# Altium PCB Game Joystick 510.PcbDoc (part 2 of 2)
Units mil, origin at the board's own origin, x right, y up, seen from the top; angles counter-clockwise.
Board outline 4889.97 x 4392.01 mil, 2 copper layers (Top Layer, Bottom Layer); 77 components, 82 nets, 383 pads, 99 vias.
Unrouted connection lines stored in the file: 79.
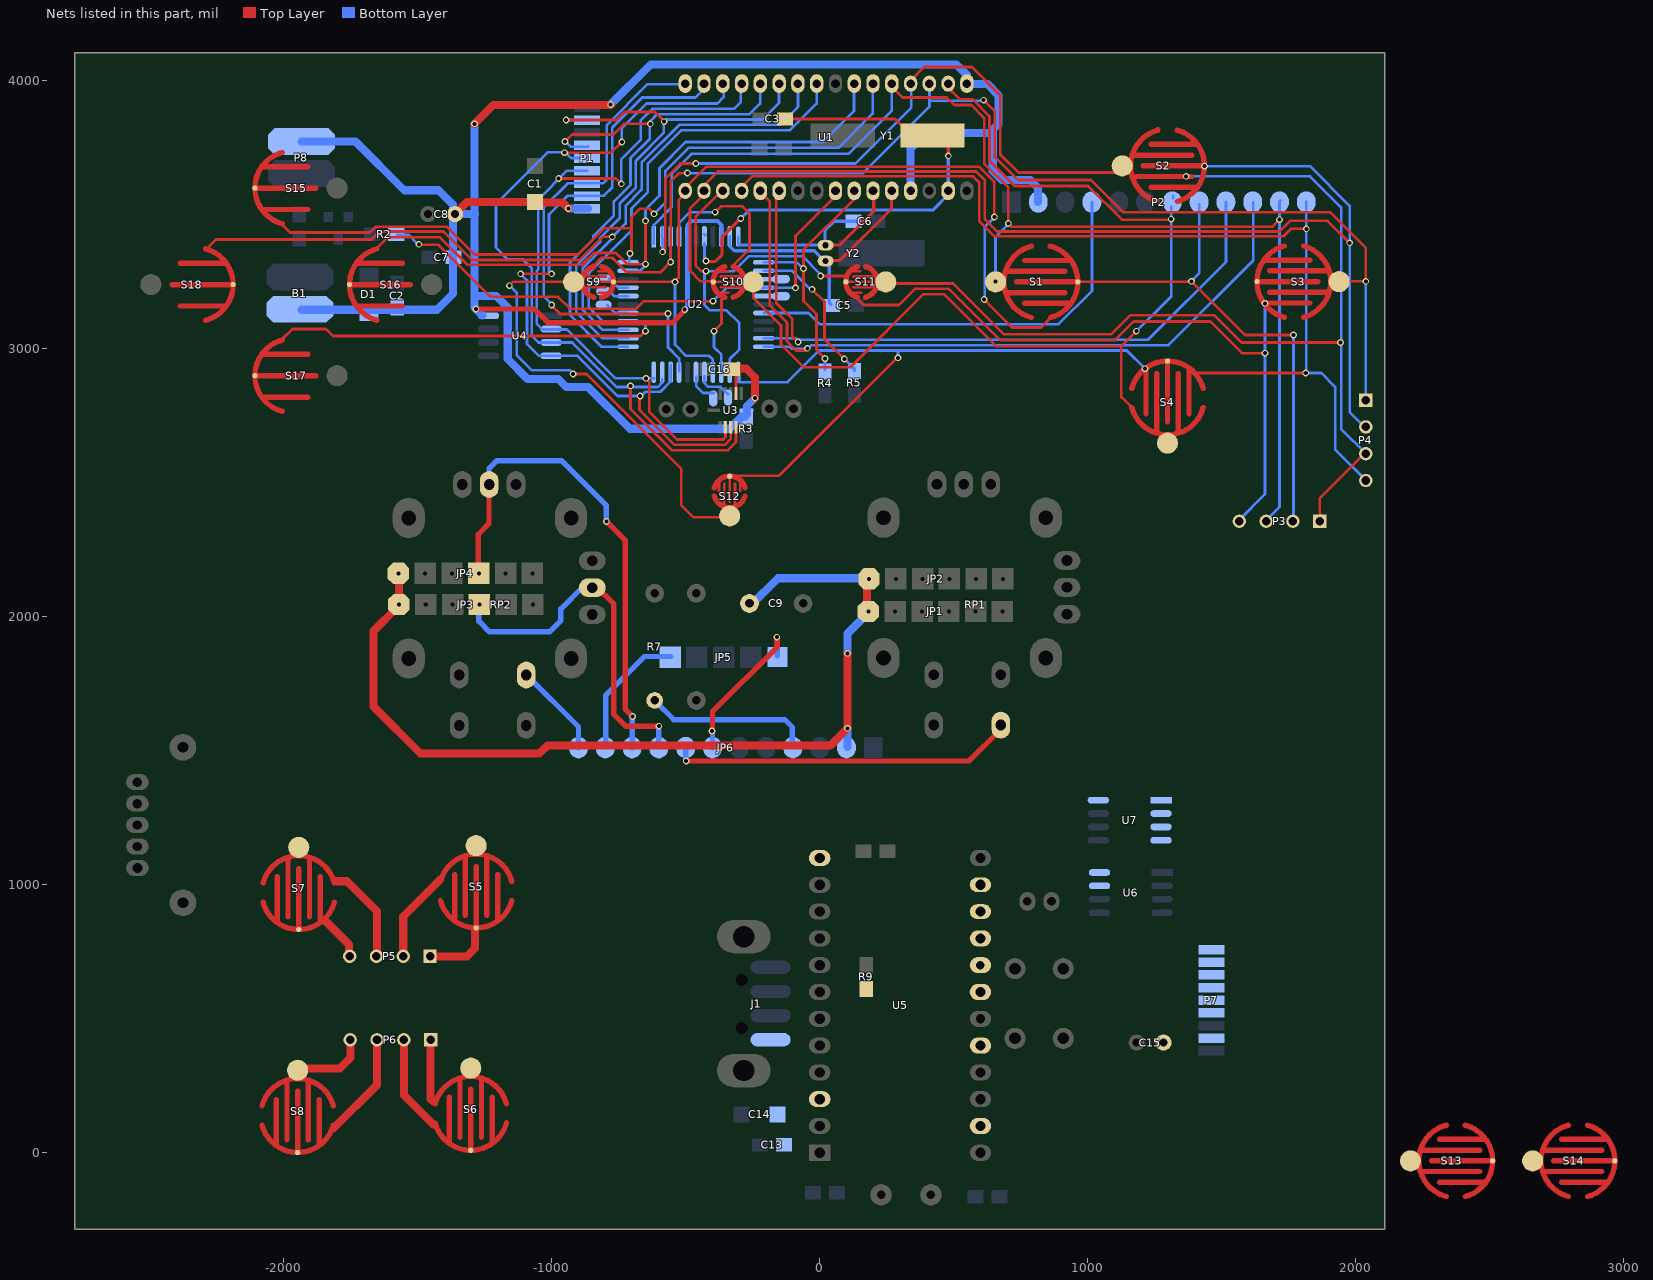
[diagram p2: the nets of this part, all layers, seen from the top]

## Via types
v1: diameter 25, hole 15, Top Layer to Bottom Layer, 90 vias
v2: diameter 30, hole 20, Top Layer to Bottom Layer, 9 vias

## Nets (pads, with @x,y where several pads share a name; then routed paths per layer and width w, separated by ;. In a path a pad name is that pad's centre, name@x,y a point inside that pad or via, vN(x,y) a via of type N, cw(c..) or ccw(c..) an arc to the next point about the centre after c; other vN are vias at no path point) (continued)
OSCO: C3.2 U1.2 U2.7 Y1.1 | length 1919
  Top Layer w10: v1(-424.06,3328.01) v1@-423.23,3327.19 ; v1(-294.56,3486.51) v1@-294.06,3486.01 ; C3.2@-122.06,3858.01 281.94,3858.01 371.94,3768.01 Y1.1@435.94,3768.01 ; U1.2@473.94,3574.01 U1.2@473.94,3590.01 ; U1.2@475.94,3590.01 U1.2@475.94,3592.01
  Top Layer w12: v1@-422.06,3326.01 -390.06,3326.01 -364.06,3352.01 -364.06,3418.01 v1@-296.06,3486.01 ; v1@479.94,3718.01 Y1.1@479.94,3764.01
  Bottom Layer w10: v1@-430.08,3334.03 v1(-424.06,3328.01) ; U2.7@-430.06,3428.01 U2.7@-426.06,3424.01
  Bottom Layer w12: v1@-430.08,3334.03 U2.7@-430.08,3393.16 ; v1(-294.56,3486.51) -263.06,3518.01 421.95,3518.01 479.94,3576 v1@479.94,3718.01
  other v1: 480,3720.35
P74: JP5.5 JP6.11 P2.11 P3.3 P5.3 S1.2 S7.2 S14.2 U1.28 U2.1 | length 5488.6
  Top Layer w10: -1812.06,1011.25 -1806.06,1011.25 ; P5.3@-1658.06,731.25 P5.3@-1658.06,733.34 ; U1.28@265.94,3982.01 309.6,3938.35 474,3938.35 502.34,3910.01 565.94,3910.01 613.94,3862 613.94,3692.01 704.22,3601.73 v1(704.22,3467.72) 715.93,3456.01 1689.94,3456.01 v1(1715.94,3482.01)
  Top Layer w30: -1806.06,1013.25 -1764.06,1013.25 -1652.06,901.25 -1652.06,741.25 P5.3@-1660.06,733.25
  Bottom Layer w10: U2.1@-619.06,3393.16 -619.06,3463.01 -552.06,3530.01 -552.06,3654.01 -478.06,3728.01 107.94,3728.01 269.2,3889.26 U1.28@269.2,3990.03 ; v1(655.94,3252.01) 655.94,3418.29 704.22,3466.57 v1(704.22,3467.72) ; P3.3@1664.35,2358.41 1715.94,2410.01 P2.11@1716,3548 ; P2.11@1715.94,3550.01 P2.11@1719.94,3554.01
  Bottom Layer w20: JP6.11@-798.06,1518.01 -798.06,1708.01 -654.06,1852.01 JP5.5@-556.06,1852.01
P75: P3.1 P4.3 P5.2 P6.4 S2.2 S5.2 S8.2 S11.2 U1.29 U2.2 | length 6980.8
  Top Layer w10: S8.2@-1946.06,313.25 S8.2@-1928.06,313.25 ; v1(-586.06,3362.01) -576.06,3372.01 -576.06,3636.01 -520.06,3692.01 v1(-462.06,3692.01) ; S11.2@259.94,3244.01 497.94,3244.01 687.6,3054.35 1088,3054.35 1159.66,3126.01 1471.94,3126.01 1573.94,3024.01 v1@1941.94,3024.01 ; U1.29@337.94,4000.01 389.94,4052.01 567.94,4052.01 673.94,3946.01 673.94,3726.01 741.94,3658.01 1105.94,3658.01 S2.2@1125.94,3678.01 ; P3.1@1865.94,2364.01 1865.94,2442.01 P4.3@2031.94,2608.01
  Top Layer w20: 1262.21,3816.17 1262.21,3818.27
  Top Layer w30: S8.2@-1942.9,314.49 -1790.9,314.49 -1750.9,354.49 P6.4@-1750.9,420.49 ; P5.2@-1554,733.34 -1554,881.31 -1416.06,1019.25
  Bottom Layer w10: U2.2@-590.06,3421.36 U2.2@-587.5,3423.91 ; U2.2@-587.56,3393.16 U2.2@-587.56,3454.5 ; v1@-586.06,3364.01 U2.2@-586.06,3412.01 ; v1(-462.06,3692.01) 133.94,3692.01 341.94,3900.01 U1.29@341.94,3986.01 ; v1(1367.94,3644.01) 1829.94,3644.01 1945.94,3528.01 1945.94,2700.81 P4.3@2038,2608.76
  other v1: 1943.94,3024.01
P76: P4.1 P6.1 S3.2 S6.2 S9.2 S12.2 U1.30 U2.3 | length 6434.1
  Top Layer w10: P6.1@-1452,421.34 P6.1@-1452.06,427.25 ; -1444.06,189.25 -1440.06,185.25 ; v1(-1158.06,3236.01) -1144.06,3250.01 -922.06,3250.01 S9.2@-918.06,3254.01 ; v1(-920.06,2906) -870.05,2906 -516.06,2552.01 -516.06,2416.01 -472.05,2372 S12.2@-336.06,2372 ; -846.06,3308 -814.06,3340 -774.06,3340 -753.9,3319.84 -720.06,3286 -594.06,3286 v1(-556.06,3324.01) ; v1@-556.06,3326.01 -556.06,3624.01 -524.06,3656.01 v1(-494.06,3656.01) ; S12.2@-338.06,2374.01 S12.2@-336.06,2374.01 ; U1.30@407.94,3994.01 U1.30@407.94,4008.01 ; v1(611.94,3928.01) 653.94,3886.01 653.94,3716.01 739.94,3630.01 1011.94,3630.01 1131.94,3510.01 1903.94,3510.01 2037.94,3376.01 v1(2037.94,3252.01) S3.2@1938.49,3252.01
  Top Layer w20: -846.06,3306 -846.06,3308
  Top Layer w30: P6.1@-1452.06,423.25 -1452.06,201.25 -1442.06,191.25
  Bottom Layer w10: v1(-1158.06,3236.01) -1130.06,3208.01 -1130.06,2976.01 -1074.05,2920 -932.06,2920 v1@-920.06,2908 ; v1@-929.51,2906 v1(-920.06,2906) ; v1@-556.01,3330.06 U2.3@-556.01,3423.91 ; v1(-494.06,3656.01) 161.94,3656.01 409.94,3904.01 U1.30@409.94,3988.01 ; 409.94,3926.01 v1@609.94,3926.01 ; P4.1@2037.94,2812.01 v1(2037.94,3252.01)
P77: JP5.1 JP6.7 P2.7 S4.2 S10.2 S13.2 U1.31 U2.4 | length 4974.1
  Top Layer w10: v1(-390.06,3510.01) -368.06,3532.01 -288.06,3532.01 -262.06,3506.01 -262.06,3372.01 -318.06,3316.01 -318.06,3312.01 ; -326.06,3308.01 -318.06,3308.01 -318.06,3310.01 -317.06,3311.01 ; S10.2@-248.06,3250 -248.06,3192 -144.06,3088 -144.06,3016.01 -60.05,2932 115.94,2932 387.94,3204 463.94,3204 657.6,3010.35 1126.28,3010.35 v1(1181.94,3066.01) v1@1181.94,3064.29 ; U1.31@473.94,3980.01 521.94,3932.01 569.94,3932.01 633.94,3868 633.94,3702.01 727.94,3608.01 1001.94,3608.01 1127.94,3482.01 v1@1311.94,3482.01 ; U1.31@477.94,3980.01 U1.31@477.94,3988.01 ; 1125.94,3010.01 1125.94,2820.01 1164.99,2780.96
  Top Layer w20: v1(-402.06,1574.01) -400.06,1576.01 -400.06,1646.01 -158.06,1888.01 v1@-158.06,1924.01 ; v1@-401.94,1568.01 v1@-401.94,1574.12
  Bottom Layer w10: U2.4@-524.57,3390.01 -524.57,3469.5 -484.06,3510.01 v1(-390.06,3510.01) ; v1@-401.94,1568.01 v1@-400,1569.95 ; v1(-160.06,1924.01) v1@-158.06,1922.01 ; v1(1181.94,3066.01) 1311.94,3196.01 P2.7@1311.94,3530.01 ; P2.7@1319.94,3562.01 P2.7@1319.94,3572.01
  Bottom Layer w20: JP6.7@-400,1512 v1@-400,1569.95 ; JP5.1@-158.06,1854.01 v1@-158.06,1922.01
  other v1: 1311.94,3484.01
P81_LED: R4.1 U1.7 U2.12 | length 992.6
  Top Layer w10: v1@19.94,2960.01 v1(19.94,2964.01) -12.06,2996.01 -12.06,3130 -60.06,3178 -60.06,3370.01 127.94,3558.01 U1.7@127.94,3588.01
  Bottom Layer w10: U2.12@-208.91,3323.01 -85.06,3323.01 -64.06,3302.01 v1@-60.06,3302.01 ; R4.1@19.94,2922.01 v1@19.94,2960.01 ; U1.7@125.94,3558.01 U1.7@125.94,3586.01 ; U1.7@127.94,3560.01 U1.7@127.94,3590.01
  other v1: -60.06,3300.01
P82_LED: R5.1 U2.13 | length 588.3
  Top Layer w10: v1(-28.06,3222) 17.94,3176 17.94,3036.01 v1(91.94,2962.01)
  Bottom Layer w10: U2.13@-208.91,3291.51 -103.56,3291.51 -36.05,3224 v1@-28.06,3224 ; v1(91.94,2962.01) 129.94,2924.01 R5.1@129.94,2918.01 ; R5.1@121.94,2928.01 R5.1@131.94,2928.01
P84_MOTOR: R2.1 U1.8 U2.15 | length 2057.3
  Top Layer w10: v1@-1494.06,3388.01 -1422.06,3388.01 -1228.06,3194.01 -976.06,3194.01 -932.06,3150.01 -684.05,3150.01 -656.06,3178 v1(-398.06,3178) ; v1@-90.06,3230.01 -90.06,3422.01 U1.8@69.94,3582.01
  Bottom Layer w10: R2.1@-1576.06,3426.01 -1534.06,3426.01 v1@-1500.06,3392 ; v1(-398.06,3178) -348.05,3228.01 v1@-88.06,3228.01 ; U1.8@58.96,3588.01 U1.8@58.96,3590.03 ; U1.8@61.94,3578.01 U1.8@61.94,3588.01
  other v1: -90.06,3228.01 -1496.06,3390.01
P94: JP6.12 P2.12 P4.4 P6.3 RP2.8 S4.1 S8.1 S12.1 S14.1 U1.13 U2.23 | length 7111.8
  Top Layer w10: S12.1@-335.8,2526.57 -151.78,2526.57 v1@289.65,2968 ; U1.13@-291.43,3590.03 -291.43,3604.63 -252.06,3644.01 571.94,3644.01 596,3619.95 596,3475.95 651.94,3420.01 1729.94,3420.01 1757.94,3448.01 v1(1815.94,3448.01) ; 1399.64,2910.01 v1(1813.94,2910.01)
  Top Layer w30: -1812.06,93.25 -1652,253.31 P6.3@-1652,421.34
  Bottom Layer w10: U2.23@-304.02,2917.61 -304.02,2881.97 -298.06,2876.01 -120.05,2876.01 -2.05,2994.01 1145.94,2994.01 v1(1213.94,2926.01) ; U1.13@-292.06,3588.01 U1.13@-290.06,3588.01 ; v1(292,2966.35) 292,2992.36 ; v1(1813.94,2910.01) 1871.94,2910.01 1923.94,2858.01 1923.94,2624.01 P4.4@2035.94,2512.01 ; 1815.94,3430.01 1815.94,3501.95 1816,3502.01 P2.12@1816,3548 ; v1@1816,2912.06 1816,3430.01
  Bottom Layer w20: RP2.8@-1090.06,1780.01 -900,1589.95 JP6.12@-900,1512
P95: P3.4 P5.4 S3.1 S7.1 S11.1 U1.14 U2.24 | length 4316.3
  Top Layer w10: -1856.06,863.25 -1851.06,858.25 ; v1(-424.06,3290.01) -442.06,3290.01 -462.06,3310.01 -462.06,3494.01 -368.06,3588.01 U1.14@-362.06,3588.01 ; U1.14@-362.06,3578.01 U1.14@-362.06,3586.01 ; U1.14@-360.06,3574.01 U1.14@-360.06,3592.01 ; v1@7.94,3272.01 95.94,3272.01 115.94,3292.01 ; 141.94,3190.01 141.94,3186.01 163.94,3164.01 295.95,3164.01 355.94,3224 481.94,3224 673.6,3032.35 1102,3032.35 1171.66,3102.01 1457.94,3102.01 1575.94,2984.01 v1(1661.94,2984.01)
  Top Layer w20: v1(1661.94,3170.01) 1663.04,3171.1 1743.94,3171.1
  Top Layer w30: -1844.06,865.25 -1756.06,777.25 P5.4@-1756.06,731.25
  Bottom Layer w10: U1.14@-360.06,3570.01 U1.14@-360.06,3582.01 ; U2.24@-335.51,2917.61 -335.51,2962.54 -300,2998.06 -300,3095.94 -348.06,3144 -410.06,3144 -430.06,3164 -430.06,3284.01 v1(-424.06,3290.01) -320.06,3290.01 -264.06,3346 -64.05,3346 3.94,3278.01 v1@3.94,3270.01 ; P3.4@1563.94,2360.01 1661.94,2458.01 v1(1661.94,3170.01)
  other v1: 3.94,3272
P96: P4.2 P6.2 S2.1 S6.1 S10.1 U1.15 U2.25 | length 5213.9
  Top Layer w10: -1437.06,110.25 -1434.06,107.25 ; U1.15@-431.59,3590.03 U1.15@-431.59,3592.01 ; U1.15@-431.59,3610.47 -380.06,3662.01 583.94,3662.01 616,3629.95 616,3484.35 662.34,3438.01 1715.94,3438.01 1755.94,3478.01 1895.94,3478.01 v1(1977.94,3396.01) ; U1.15@-430.06,3592.01 -430.06,3578.01 -484.06,3524.01 -484.06,3292.01 -444.06,3252.01 S10.1@-398.06,3252.01 ; v1@-394.06,3068.01 -392.34,3068.01 -366.06,3094.29 -366.06,3184.01 -354.06,3196.01
  Top Layer w30: P6.2@-1552.06,423.25 -1552.06,215.25 -1442.06,105.25
  Bottom Layer w10: v1@-394.06,3068.01 -394.06,3006.01 -367.01,2978.96 U2.25@-367.01,2917.61 ; v1(1435.94,3682.01) 1829.94,3682.01 1977.94,3534.01 1977.94,2764.01 P4.2@2033.94,2708.01
  other v1: -394,3066.35
P97: JP6.8 P2.8 P3.2 P5.1 RP1.10 S1.1 S5.1 S9.1 S13.1 U1.16 U2.26 | length 6425.8
  Top Layer w10: S9.1@-767.92,3250.03 -580.06,3250.03 ; -580.03,3250.01 v1(-540.06,3250) ; v1@-540.06,3248 -540.06,3252.01 -526.06,3266.01 -526.06,3556 U1.16@-500.06,3582 ; U1.16@-504.06,3596.01 -504.06,3598.01 -422.06,3680.01 593.94,3680.01 652,3621.95 v1@652,3488.01 ; U1.16@-502.06,3580.01 U1.16@-500.06,3580.01 ; U1.16@-502.06,3588.01 U1.16@-500.06,3586.01 ; U1.16@-495.71,3589.13 -495.18,3592.63 U1.16@-494.06,3600.01 ; v1(613.94,3184.01) 717.94,3080.01 825.94,3080.01 863.94,3118.01 ; S1.1@963.35,3250.03 1387.94,3250.03 1389.92,3250.03 1587.94,3052.01 v1(1767.94,3052.01)
  Top Layer w20: v1@-498.06,1464.01 -496.06,1462.01 557.95,1462.01 673.94,1578 RP1.10@673.94,1596.01
  Top Layer w30: P5.1@-1454,733.34 -1316.05,733.34 -1286.06,763.33 S5.1@-1286.06,831.25
  Bottom Layer w10: v1@-540.06,3248 -540.06,3016.01 -498.06,2974.01 -412.06,2974.01 -398.5,2960.46 U2.26@-398.5,2917.61 ; v1@-500,1465.95 v1@-498.06,1464.01 ; v1(613.94,3184.01) 615.94,3186.01 615.94,3454.29 649.66,3488.01 v1@652,3488.01 ; v1@1387.94,3254.01 1415.94,3282.01 P2.8@1415.94,3540.01 ; P3.2@1767.94,2360.01 v1(1767.94,3052.01)
  Bottom Layer w20: v1@-500,1465.95 JP6.8@-500,1512
  other v1: -498.06,1462.01 1387.94,3252.01 652,3492.35
PB1_LEFT: S18.1 U1.23 U2.36 | length 3218.6
  Top Layer w10: -2287.92,3372.15 -2252.06,3408.01 -1672.06,3408.01 -1642.06,3438.01 -1404.06,3438.01 -1298.06,3332.01 -896.06,3332.01 -810.06,3418.01 v1(-774.06,3418.01)
  Bottom Layer w10: U2.36@-714.91,3071.04 -810.69,3071.04 -884,3144.35 -884,3302.35 -774.06,3412.29 v1(-774.06,3418.01) -724.06,3468.01 -724.06,3534.01 -664.06,3594.01 -664.06,3696.01 -524.06,3836.01 -148.06,3836.01 -81.2,3902.87 U1.23@-81.2,3990.03
PB2_DOWN: S17.1 U1.24 U2.37 | length 3078.5
  Top Layer w10: -2006.06,3036.01 -1968.06,3074.01 -1842.06,3074.01 -1816.06,3048.01 -668.34,3048.01 -652.35,3064 v1@-646.06,3064
  Bottom Layer w10: v1@-650.06,3068 -650.06,3089.99 -662.6,3102.54 -808.19,3102.54 -862,3156.35 -862,3282.06 -702.06,3442.01 -702.06,3524.01 -642.06,3584.01 -642.06,3690.01 -516.06,3816.01 -110.06,3816.01 -11.12,3914.94 U1.24@-11.12,3990.03
  other v1: -650.06,3066
PB4_RIGHT: S16.1 U1.26 U2.43 | length 2454.3
  Top Layer w10: -1648.06,3380.01 -1612.06,3416.01 -1416.06,3416.01 -1314.06,3314.01 -886.06,3314.01 -842.06,3358 -760.06,3358 -718.06,3316 v1(-650.06,3316) ; v1@-652.06,3316 -650.06,3318 v1@-650.06,3476.01
  Bottom Layer w10: U2.43@-714.91,3291.51 -670.55,3291.51 -652.06,3310.01 v1@-652.06,3316.01 ; v1(-650.06,3478.01) -650.06,3520.01 -598.06,3572.01 -598.06,3674.01 -500.06,3772.01 11.94,3772.01 127.94,3888.01 U1.26@127.94,3982.01
PB5_UP: S15.1 U1.27 U2.44 | length 2836.4
  Top Layer w10: -2010.06,3468.01 -1976.06,3434.01 -1678.06,3434.01 -1656.06,3456.01 -1392.06,3456.01 -1288.06,3352.01 -902.06,3352.01 -804.06,3450.01 -704.06,3450.01 -702.06,3452.01 ; v1@-710.06,3356.01 -702.06,3364.01 -702.06,3492.01 -671.72,3522.35 -634.4,3522.35 v1@-618.06,3506.01
  Bottom Layer w10: U2.44@-710.06,3326.01 v1@-710.06,3356.01 ; v1(-618.06,3504.01) -576.06,3546.01 -576.06,3664.01 -490.06,3750.01 69.94,3750.01 197.94,3878.01 U1.27@197.94,3986.01
  other v1: -708.06,3356.01
PKT_FLAG_P66: P7.8 U5.20
PKT_FLAG_PB0: P1.8 U1.22 U2.35 | length 2074.1
  Top Layer w10: v1(-946.06,3854.01) -758.06,3854.01 -728.06,3884.01 -614.06,3884.01 v1@-580.06,3850.01
  Bottom Layer w10: v1(-946.06,3854.01) P1.8@-864.06,3854.01 ; U2.35@-714.91,3039.54 -811.2,3039.54 -908,3136.35 -908,3310.35 -820.06,3398.29 -820.06,3414.01 -746.06,3488.01 -746.06,3542.01 -686.06,3602.01 -686.06,3702.01 -582.06,3806.01 v1@-582.06,3848.01 ; v1@-572.06,3856.01 -214.06,3856.01 -152.06,3918.01 U1.22@-152.06,3992.01
  other v1: -580.06,3848.01
REFERENCE: JP6.4 P2.4 R7.1 U2.18 | length 2250.2
  Bottom Layer w10: U2.18@-208.91,3134.03 -42.08,3134.03 -0.06,3092.01 891.94,3092.01 1016,3216.06 P2.4@1016,3548
  Bottom Layer w20: R7.1@-614.06,1686.01 -544.06,1616.01 -130.06,1616.01 -102.06,1588.01 JP6.4@-102.06,1516.01
RESET_N_P61: P7.3 U5.15
RF_RESET_PA3: P1.3 U1.17 U2.30 | length 1894.3
  Top Layer w10: v1@-1000.06,3162.01 -968.05,3130 v1@-568.06,3130
  Bottom Layer w10: v1@-998.06,3166.01 -1030.06,3198.01 -1030.06,3528.01 -940.06,3618.01 P1.3@-868.06,3618.01 ; P1.3@-868.06,3617.71 -808.36,3617.71 -794.06,3632.01 -794.06,3836.01 -642.06,3988.01 U1.17@-500.06,3988.01 ; v1(-566.06,3132) -566.06,3006.01 -524.49,2964.44 U2.30@-524.49,2917.61 ; U1.17@-501.67,3988.01 U1.17@-501.67,3990.03
  other v1: -1000.06,3164.01
RX_P93/AD0: JP4.4 JP6.10 P2.10 RP2.5 U1.12 U2.22 | length 4775.5
  Top Layer w10: JP4.4@-1270.06,2160.01 JP4.4@-1270.06,2162.01 ; RP2.5@-1236.06,2492.01 RP2.5@-1236.06,2498.01 ; U1.12@-223.72,3587.67 -186.06,3550.01 -186.06,3162.01 -122.06,3098.01 -122.06,3028.01 -88.06,2994.01 -54.06,2994.01 v1(-46.06,3002.01)
  Top Layer w20: JP4.4@-1274.06,2162.01 -1274.06,2308.01 -1234.06,2348.01 RP2.5@-1234.06,2492.01 ; v1(-796.06,2356.01) -726.06,2286.01 -726.06,1656.01 v1(-698.06,1628.01)
  Bottom Layer w10: JP6.10@-700,1512 JP6.10@-700,1512 ; v1@-700,1626.06 v1(-698.06,1628.01) ; U1.12@-222.06,3564.01 U1.12@-222.06,3586.01 ; U2.22@-208.06,3008.01 -112.06,3008.01 -104.06,3000.01 -44.06,3000.01 -30.06,3014.01 1301.94,3014.01 1617.94,3330.01 P2.10@1617.94,3546.06
  Bottom Layer w20: RP2.5@-1234.06,2500.01 -1234.06,2554.01 -1206.06,2582.01 -962.06,2582.01 -796.06,2416.01 v1(-796.06,2356.01) ; JP6.10@-700,1512 v1@-700.06,1630.01
RY_P92/AD1: JP3.4 JP6.9 P2.9 RP2.2 U1.11 U2.21 | length 4029.3
  Top Layer w10: U1.11@-148.06,3584.01 -162,3570.06 -162,3171.95 -102.06,3112.01 -102.06,3046.01 v1@-82.06,3026.01 ; v1@-81.06,3027.01 v1(-80.06,3026.01)
  Top Layer w20: RP2.2@-834.06,2114.01 -768.06,2048.01 -768.06,1636.01 -724.06,1592.01 v1(-600.06,1592.01)
  Bottom Layer w10: JP6.9@-600.06,1526.01 JP6.9@-596.06,1522.01 ; U2.21@-208.06,3040.01 -90.06,3040.01 -84.06,3034.01 1225.94,3034.01 1516,3324.06 P2.9@1516,3548
  Bottom Layer w20: JP3.4@-1272.06,2046.01 -1272.06,1984.01 -1232.06,1944.01 -1008.06,1944.01 -966.06,1986.01 -966.06,2030.01 -886.06,2110.01 RP2.2@-848.06,2110.01 ; JP6.9@-600.06,1526.01 v1(-600.06,1592.01)
SPI_CLK_P62: P7.4 U5.16 U7.2
SPI_CLK_PA6: P1.4 U1.20 U2.33 U3.7 U4.2 | length 2685.7
  Top Layer w10: v1(-974.06,3636.01) -760.06,3636.01 v1(-740.06,3616.01) ; v1(-648.06,2890.01) -636.06,2878.01 -636.06,2766.01 -532.06,2662.01 -360.06,2662.01 -351.69,2670.38 U3.7@-351.69,2707.76
  Bottom Layer w10: P1.4@-868.06,3664.95 -943.11,3664.95 -1050.06,3558.01 -1050.06,3296.01 -1056.06,3290.01 -1056.06,3094.01 -1034.06,3072.01 -943.66,3072.01 -761.66,2890.01 U2.33@-618.06,2890.01 ; v1(-740.06,3616.01) -740.06,3708.01 -668.06,3780.01 -668.06,3852.01 -624.06,3896.01 -320.06,3896.01 -294.06,3922.01 U1.20@-294.06,3984.01
SPI_CS_P56: U5.12 U7.1
SPI_MISO_P60: P7.2 U5.14 U7.4
SPI_MISO_PA4: P1.2 U1.18 U2.31 U3.8 U4.4 | length 2773.5
  Top Layer w10: v1(-1116.06,3280.01) v1(-1000.06,3280.01) ; v1@-672.06,2824.01 -672.06,2772.01 -542.06,2642.01 -354.06,2642.01 -332,2664.06 U3.8@-332,2707.76 ; U1.18@-432.06,3960.01 U1.18@-432.06,3996.01
  Bottom Layer w10: v1(-1116.06,3280.01) -1092.06,3256.01 -1092.06,3018.01 -1048.06,2974.01 -903.66,2974.01 -753.66,2824.01 -666.05,2824.01 -650.06,2840 -593.52,2840 -555.98,2877.53 -555.98,2912.08 U2.31@-558.06,2910.01 ; v1(-1000.06,3280.01) -1010.06,3290.01 -1010.06,3502.01 -940.06,3572.01 -804.06,3572.01 -774.06,3602.01 -774.06,3826.01 -662.06,3938.01 -464.06,3938.01 -434.06,3968.01 U1.18@-434.06,3994.01 ; U2.31@-555.98,2917.61 U2.31@-555.98,2940.01
  other v1: -670.06,2824.01
SPI_MOSI_P63: P7.5 U5.17 U7.3
SPI_MOSI_PA5: P1.5 U1.19 U2.32 U3.9 U4.3 | length 2956.5
  Top Layer w10: v1(-952.06,3732.01) -778.12,3732.01 v1(-738.06,3772.07) ; v1(-706.06,2862.01) -706.06,2776.01 -552.06,2622.01 -342.06,2622.01 -312.32,2651.75 U3.9@-312.32,2707.76
  Bottom Layer w10: P1.5@-868.06,3712.19 -928.24,3712.19 -950.06,3734.01 -1014.06,3734.01 -1208.06,3540.01 -1208.06,3378.01 -1164.06,3334.01 -1108.06,3334.01 -1074.06,3300.01 -1074.06,3048.01 -1050.06,3024.01 -923.66,3024.01 -757.66,2858.01 -604.06,2858.01 -587.54,2874.53 U2.32@-587.54,2886.86 ; v1(-738.06,3772.07) -738.06,3824.01 -646.06,3916.01 -382.06,3916.01 -358.06,3940.01 U1.19@-358.06,3980.01
SPI_SS_P64: P7.6 U5.18
SPI_SS_PA7: P1.6 U1.21 U2.34 | length 2057.1
  Top Layer w10: v1@-948.06,3776.01 -924.06,3800.01 -770.06,3800.01 -730.06,3840.01 v1(-632.06,3840.01)
  Bottom Layer w10: v1@-948.06,3774.01 -928.06,3754.01 -866.06,3754.01 P1.6@-864.06,3756.01 ; U2.34@-716.06,3006.01 -718.06,3008.01 -813.66,3008.01 -932,3126.35 -932,3322.4 -844.06,3410.35 -844.06,3422.01 -768.06,3498.01 -768.06,3550.01 -706.06,3612.01 -706.06,3712.01 -634.06,3784.01 v1@-634.06,3838.01 ; v1(-632.06,3840.01) -632.06,3850.01 -606.06,3876.01 -262.06,3876.01 -222.06,3916.01 U1.21@-222.06,3989.33
  other v1: -950.06,3774.01
TEST_P71: pad.1 U2.40 | length 80.3
  Bottom Layer w10: pad.1@-786,3216.35 -766,3196.35 U2.40@-714,3196.35
TEST_P72: pad.0 U2.41 | length 84.1
  Bottom Layer w10: pad.0@-786,3262.35 -752,3228.35 U2.41@-716,3228.35
TEST_P83: pad.5 U2.14
TEST_P85: pad.6 U2.16
TEST_PA0: pad.3 U2.27 | length 131.4
  Bottom Layer w10: U2.27@-430,2898.35 -430,2872.35 -416,2858.35 -370,2858.35 pad.3@-342,2830.35
TEST_PA1: pad.4 U2.28 | length 111.5
  Bottom Layer w10: U2.28@-460,2896.35 -460,2860.35 -434.9,2835.24 pad.4@-394.9,2835.24
TEST_PB3: pad.2 U2.38 | length 88.8
  Bottom Layer w10: pad.2@-792,3162.35 -763.68,3134.03 U2.38@-714.91,3134.03
V3.3: C15.1 P7.1 R9.1 U5.3 | length 4.5
  Top Layer w25: C15.1@1283.94,412.09 C15.1@1287.1,415.24
VDD: B1.1 C1.1 C2.2 C7.2 C8.1 C9.2 C13.2 C14.1 C16.2 D1.1 J1.1 JP1.1 JP2.1 JP3.1 JP4.1 JP6.2 P1.1 P2.2 P8.1 R3.1 U1.4 U1.32 U2.5 U2.9 U3.2 U4.8 U5.23 U6.7 U6.8 U7.8 | length 12687.5
  Top Layer w10: JP4.1@-1570.06,2170.01 JP4.1@-1568.06,2172.01 ; U3.2@-312.32,2833.75 C16.2@-312.32,2906.26 ; JP2.1@175.94,2126.01 JP2.1@181.94,2132.01
  Top Layer w20: v1(-1283.04,3149) -1065.05,3149 -1014.06,3098 -548.35,3098 -504,3142.35 v1(-504,3146.35)
  Top Layer w30: JP3.1@-1570.9,2041.24 -1664.9,1947.24 -1664.9,1665.24 -1488.9,1489.24 -1046.9,1489.24 -1016.13,1520.01 39.94,1520.01 v1(103.94,1584.01) v1(103.94,1864.01) ; JP3.1@-1570.06,2054.01 JP4.1@-1570.06,2170.01 ; C8.1@-1360.06,3504.01 -1316.06,3548.01 C1.1@-1064.06,3548.01 ; v1(-1288.06,3840.01) -1218.06,3910.01 v1@-778.06,3910.01 ; C1.1@-1062.06,3546.01 -960.06,3546.01 v1(-938.06,3524.01) ; C16.2@-330.06,2926 -274.06,2926 -242.06,2894 v1(-242.06,2816.01) ; JP1.1@175.94,2020.01 JP2.1@175.94,2126.01
  Bottom Layer w15: U2.5@-493.07,3393.16 -493.07,3462.99 -478.56,3477.51 -381.56,3477.51 -367.09,3463.04 U2.9@-367.09,3393.16 ; R3.1@-274,2746.76 R3.1@-274.06,2756.01 ; U1.4@335.94,3596.01 U1.4@335.94,3620.01
  Bottom Layer w20: v1(-504,3146.35) -493.07,3157.28 U2.5@-493.07,3420
  Bottom Layer w30: B1.1@-1934.06,3146.01 -1428.06,3146.01 -1368.06,3206.01 -1368.06,3538.01 -1422.06,3592.01 -1550.06,3592.01 -1732.06,3774.01 P8.1@-1934.06,3774.01 ; C2.2@-1572.06,3146.01 C2.2@-1564.06,3154.01 ; C8.1@-1364,3502.76 -1286.8,3502.76 -1288.06,3501.5 -1288.06,3154.01 U4.8@-1258.06,3124.01 ; -1288.06,3508.01 v1(-1288.06,3840.01) ; -1284.06,3198 -1208.06,3198 -1164.06,3154 -1164.06,2962 -1090.06,2888 -975.65,2888 -945.65,2858 -864.06,2858 -708.06,2702 -336.06,2702 -290.06,2748 R3.1@-276.06,2748 ; v1@-932.06,3524.01 P1.1@-864.06,3524.01 ; v1(-780.06,3912) -630.06,4062 509.94,4062 524.2,4047.75 549.94,4022 549.94,3988 625.94,3988 667.94,3946 667.94,3840 633.94,3806 397.94,3806 339.28,3747.33 U1.4@339.28,3590.03 ; R3.1@-272.06,2756.01 -272.06,2786.01 v1(-242.06,2816.01) ; C9.2@-250.06,2050.01 -156.06,2144.01 JP2.1@187.94,2144.01 ; JP6.2@103.94,1514.01 v1(103.94,1584.01) ; v1(103.94,1864.01) 103.94,1938.01 JP1.1@183.94,2018.01 ; 645.94,3818 645.94,3664.01 679.94,3630.01 785.94,3630.01 813.94,3602.01 P2.2@813.94,3548
XIN: C5.2 U1.5 U2.10 Y2.1 | length 979.6
  Top Layer w12: Y2.1@19.94,3330.01 75.94,3330.01 267.94,3522.01 U1.5@267.94,3590.01
  Bottom Layer w10: U2.10@-335.59,3383.54 U2.10@-335.59,3419.16
  Bottom Layer w12: U2.10@-335.59,3383.54 -318.06,3366.01 -20.06,3366.01 35.94,3310.01 35.94,3172.01 C5.2@41.94,3166.01
XOUT: C6.2 U1.6 U2.11 Y2.2 | length 842.9
  Top Layer w12: Y2.2@25.94,3388.01 75.94,3388.01 201.94,3514.01 201.94,3582.01 U1.6@195.94,3588.01
  Bottom Layer w10: U2.11@-304.06,3418.01 -304.06,3392.01 U2.11@-300.06,3388.01 ; Y2.2@13.94,3388.01 Y2.2@19.94,3394.01
  Bottom Layer w12: U2.11@-300.06,3388.01 Y2.2@13.94,3388.01 ; Y2.2@19.94,3394.01 19.94,3442.01 53.94,3476.01 C6.2@141.94,3476.01
pads on no net: J1. RP1.9 RP2.7 S19.1@729,687 U3.1 U3.4 U3.6 U3.11 U3.12 U4.7 U5.13 U5.21 U5.22 U7.7

## Keep-outs
Keep-Out Layer:
  circle w8: c-2444.5,3793.95 r49.21
  circle w8: c1780.79,3793.95 r49.21
  circle w8: c778.6,3769.72 r74.8
  circle w8: c-1450.19,3769.72 r74.8
  circle w8: c1841.37,2742.16 r43.31
  circle w8: c-2501.15,2742.16 r43.31
  circle w8: c-936.11,3421.18 r45
  circle w8: c-1132.96,3421.18 r45
  circle w8: c-1886.41,711.76 r68.9
  circle w8: c-1886.41,1255.07 r68.9
  circle w8: c-1886.41,428.82 r68.9
  circle w8: c-1886.41,-114.49 r68.9
  circle w8: c-2562.65,1499.65 r65.05
  circle w8: c-346,2154.5 r49.21
  circle w8: c-1912.93,2058.05 r82.68
  circle w8: c1220.93,2058.05 r82.68
  circle w8: c-224.58,-191 r68.9
  circle w8: c-224.58,1305.08 r68.9
  circle w8: c622.77,1253.88 r68.9
  circle w8: c918.05,-131.94 r68.9
  circle w8: c1843.24,-190 r68.9
  circle w8: c1843.24,1306.06 r68.9
  lines w8: -2776.8,3317.96 -2776.8,2339.4 -2726.8,2289.4 -1989.4,2289.4 -1989.4,2368.14 -1905.61,2368.14 ; -2776.76,3317.96 cw(c-1747.79,3115.01) -2513.94,3831.23 ; -2739.87,-183.01 -2739.87,1556.27 -2611.45,1684.69 -2228,1684.69 ; -2739.81,-182.95 -2698,-224.76 -2540.06,-224.76 -2540.06,-186.76 ; -2540.06,-188.76 cw(c-2495.06,-188.76) -2450.06,-188.76 -2450.06,-224.76 -2228.06,-224.76 -2228.06,484.97 -2228.06,1272 ; -2513.58,3830.49 -2464.11,3879.95 -1520.9,3879.95 -1457.91,3942.95 -808,3942.82 -808,4102.01 566.75,4102.01 650,4018.76 788.72,3880.03 876.33,3880.03 ; -2228,1273.03 -2228,1684 ; -2162.06,597.59 -2162.06,1369.24 ; -2162,597.59 -2129.03,597.59 -1584.22,597.59 -1552.73,629.09 -1031.46,629.09 -980.9,679.64 -980.9,1285.33 -1033.32,1337.75 -1552.73,1337.75 -1584.22,1369.24 -2129.03,1369.24 -2162,1369.24 ; -2132,-228.66 -1587.2,-228.66 -1555.7,-197.17 -1037.71,-197.17 -980.9,-140.36 -980.9,457.33 -1035.06,511.5 -1555.7,511.5 -1587.2,542.99 -2132,542.99 -2162.06,542.99 -2162.06,-228.76 -2128.15,-228.76 -2128.06,-228.66 ; -1905.61,2368.47 cw(c-1231.46,2152.14) -536.89,2289.34 -134.77,2289.4 ; -1800.74,2223.14 cw(c-1228.6,2112.84) -656.52,2223.49 ; -1800.74,2223.4 -2038.91,2223.4 -2038.91,1652.54 -1822.38,1436 1130.38,1436 1346.91,1652.54 1346.91,2223.4 1108.74,2223.4 ; -1520.83,3879.95 -1457.84,3942.95 ; -657,2223.4 -35.48,2223.4 ; -532.71,2289.4 -139.01,2289.4 ; -134.77,2289.34 cw(c559.81,2152.14) 1233.95,2368.47 ; -35.48,2223.49 cw(c536.6,2112.84) 1108.74,2223.14 ; 876.33,3879.95 876.33,3880.03 ; 1233.95,2368.14 1317.75,2368.14 1317.75,2289.4 2055.15,2289.4 2105.15,2339.4 2105.15,3317.96 ; 1794.13,3879.95 1842.35,3831.73 cw(c1076.2,3115.51) 2105.17,3318.46 ; 1794.39,3880.03 876.33,3880.03 ; -410.06,-281.99 -410.06,1396 1961.99,1396 1962,-282 -410.06,-281.99 ; 1454,812 1850,812 1850,934 1454,934 1454,812

## Other copper
Bottom Layer:
  rectangle net 1: -2724,884 -2472,1096
  rectangle net 5: -2722,1354 -2471.94,1414
  rectangle net GND: -2438,1278 -2262,1596
  rectangle net GND: -2442,880 -2264,1166

## Silkscreen, mask and mechanical layers (free items; w line width, h text height)
Top Overlay:
  circle w10: c-1451,3769.76 r137.79
  circle w10: c778,3772.75 r137.8
  text "Game Joystick P510" at -2764,2492 h60
  text "2009.08.18  V1.0" at -2728.06,2334.01 h60
  text "L1" at -1552,790 h60
  text "L2" at -1752,784 h60
  text "Game Joystick P510" at -2386,742 h60 r270
  text "Game Joystick P510" at 769.1,293.24 h60
  text "R2" at -1762.06,268.01 h60
  text "R1" at -1558.98,257.84 h60
  text "2009.08.18  V1.0" at 855.1,161.24 h60
Bottom Overlay:
  circle w10: c-225.48,1303.24 r88.58
  circle w10: c-225.48,-190.76 r88.58
  circle w10: c1843.62,-191 r88.58
  circle w10: c1843.62,1305.06 r88.58
  circle w10: c621.43,1253.88 r88.58
  circle w10: c918.05,-131.94 r88.58
  lines w7.99: -361,-213.31 -361,-170 -85.41,-170 ; -359,1285.69 -359,1329 -83.41,1329 ; 483,1236.69 483,1280 758.59,1280 ; 780,-152.31 780,-109 1055.59,-109
  lines w8: -361,-213.31 -85.31,-213.31 -85.41,-213.2 -85.41,-170 ; -359,1285.69 -83.31,1285.69 -83.41,1285.8 -83.41,1329 ; 483,1236.69 758.69,1236.69 ; 758.59,1236.8 758.59,1280 ; 780,-152.31 1055.69,-152.31 ; 1055.59,-152.2 1055.59,-109
  text "VDD" at -2112,3768.76 h60
  text "GND" at -2114,3658.76 h60
  text "P72" at -864,3256.35 h35
  text "P83" at -14.9,3245.24 h35
  text "GND" at -2092,3214 h60
  text "P71" at -862,3194.35 h35
  text "P85" at -16.9,3151.24 h35
  text "PB3" at -860,3142.35 h35
  text "VDD" at -2094,3082 h60
  text "PA1" at -400.9,2761.24 h35 r90
  text "PA0" at -336.9,2761.24 h35 r90
  text "R1" at 1902,2710.76 h60 r270
  text "R2" at 1898,2510.76 h60 r270
  text "L1" at 1846,2444.76 h60
  text "L2" at 1650,2442.76 h60
  text "2009.08.18  V1.0" at -88.06,1942.01 h60
  text "Game Joystick P510" at 81.94,1728.01 h60
  text "P94" at -943,1605 h30 r180
  text "P74" at -844,1605 h30 r180
  text "RX" at -733,1605 h30 r180
  text "RY" at -636,1605 h30 r180
  text "P77" at -546,1605 h30 r180
  text "P97" at -446,1605 h30 r180
  text "LX" at -329,1605 h30 r180
  text "LY" at -230,1605 h30 r180
  text "Ref" at -143,1605 h30 r180
  text "Leak" at -52,1605 h30 r180
  text "VDD" at 54,1605 h30 r180
  text "GND" at 153.94,1604.01 h30 r180

## Text inside footprints (layer, text, board x,y; h text height)
U2: Bottom Overlay "1" at -680.06,3459.16 h45 r180
U3: Top Overlay "1" at -269,2857.76 h25 r180